# EAGLE board topboard (EAGLE 5.11)
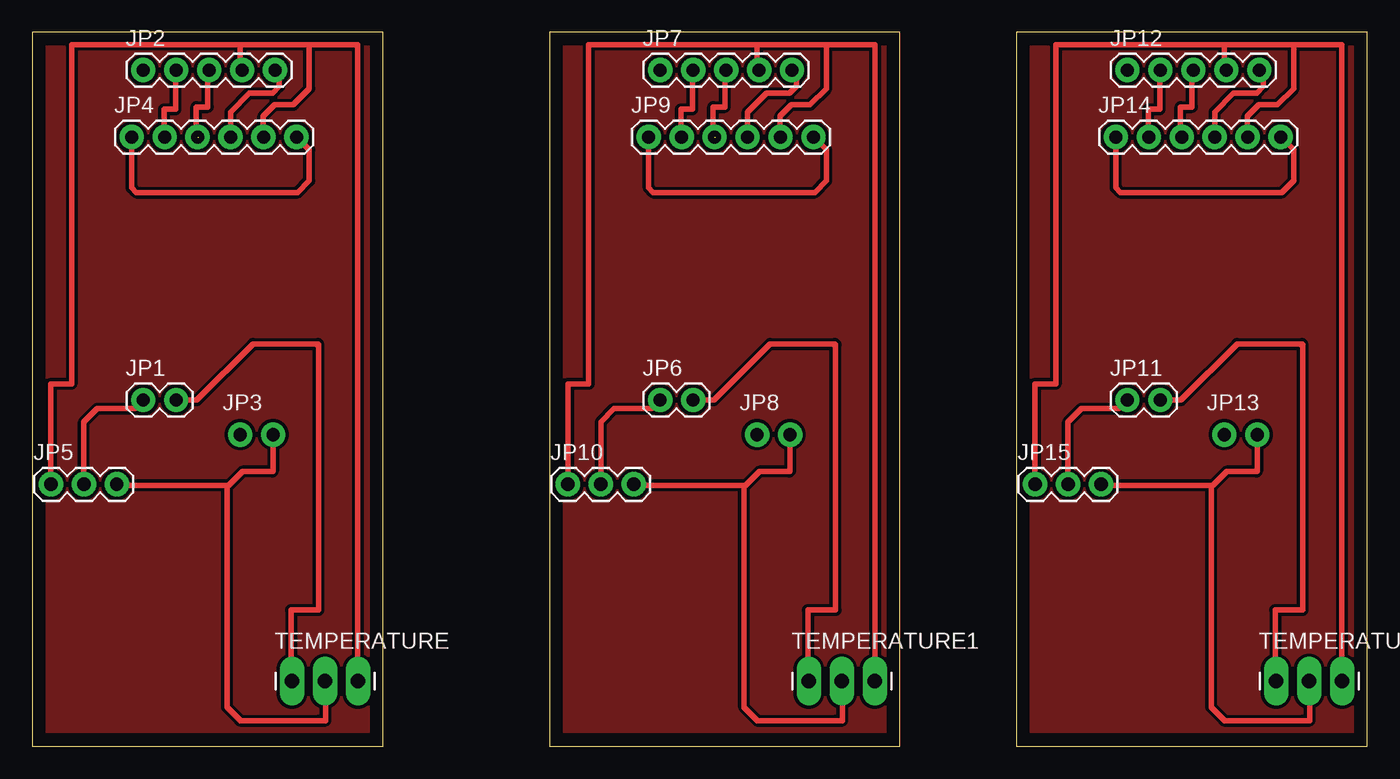
[diagram p0: board, top side]
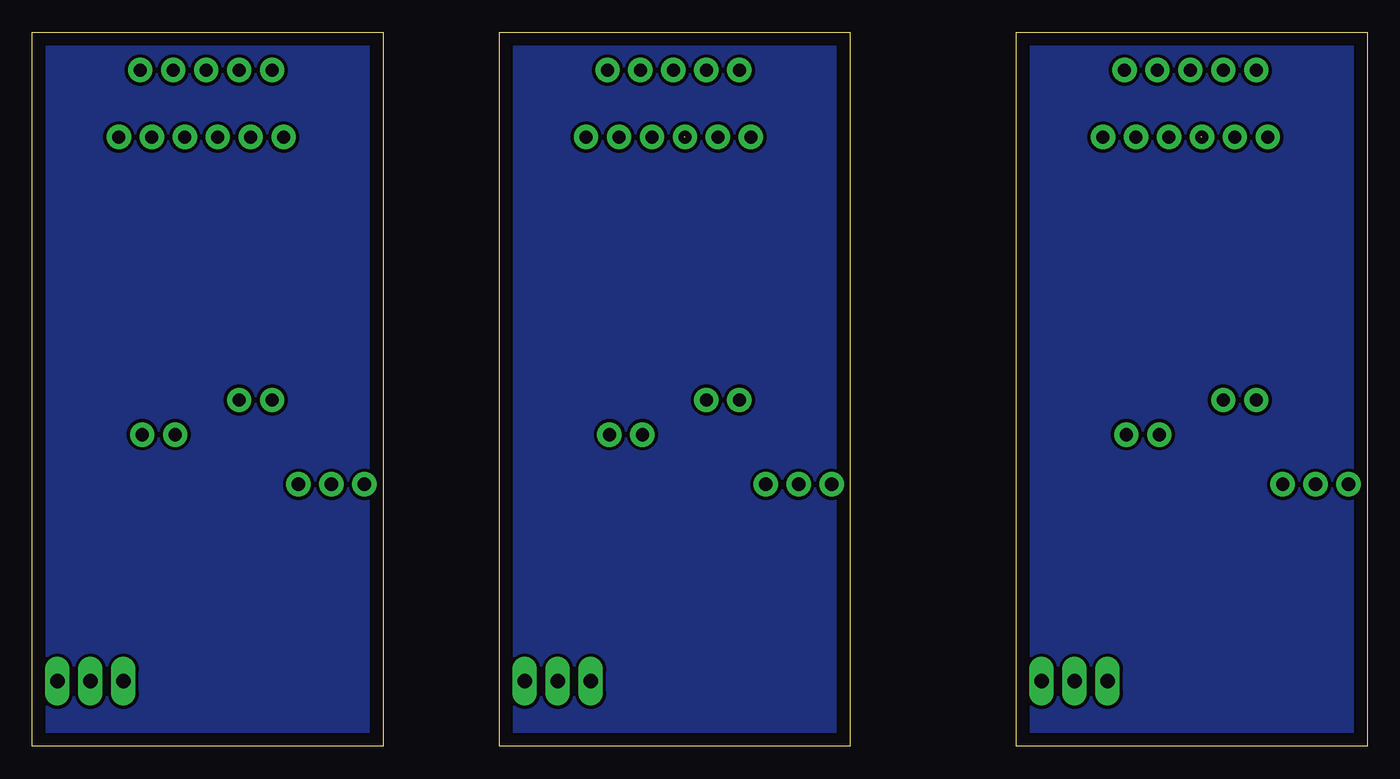
[diagram p1: board, bottom side, seen from below]

Size 102.83 x 55 mm. Coordinates in mm from the lower left corner, seen from the top.
Outline: 0,0 27,0 27,55 0,55 0,0
Outline: 39.83,0 66.83,0 66.83,55 39.83,55 39.83,0
Outline: 75.83,0 102.83,0 102.83,55 75.83,55 75.83,0
Copper layers (1*16): Top 0.035mm / dielectric 1.5mm / Bottom 0.035mm
Design rules "default": minimum track width 10mil, minimum drill 24mil, track to track 8mil, track to pad 8mil, pad to pad 8mil, via to via 8mil, smd to smd 8mil, copper to edge 40mil, drill to drill 8mil, minimum pad ring 10mil, minimum via ring 8mil, stop-mask expansion 4mil, vias tented up to drill 0mil, thermal gap 10mil

## Footprints (pad centres in the part's own frame; a part is rotated, then mirrored left to right if it is on the bottom)
1X02 = drill 1.016 pad 1.88 round: 1 0,0; 2 2.54,0
1X05 = drill 1.016 pad 1.88 round: 1 0,0; 2 2.54,0; 3 5.08,0; 4 7.62,0; 5 10.16,0
1X02_NO_SILK = drill 1.016 pad 1.88 round: 1 0,0; 2 2.54,0
1X06 = drill 1.016 pad 1.88 round: 1 0,0; 2 2.54,0; 3 5.08,0; 4 7.62,0; 5 10.16,0; 6 12.7,0
1X03 = drill 1.016 pad 1.88 round: 1 0,0; 2 2.54,0; 3 5.08,0
1X03_LONGPADS = drill 1.118 pad 1.88 long: 1 0,0; 2 2.54,0; 3 5.08,0

## Placement (x,y rotation side)
JP1  [1X02]  8.53,26.67 0 top
JP2  [1X05]  8.53,52.1 0 top
JP3  [1X02_NO_SILK]  16,24 0 top
JP4  [1X06]  7.65,46.94 0 top
JP5  [1X03]  1.42,20.18 0 top
JP6  [1X02]  48.36,26.67 0 top
JP7  [1X05]  48.36,52.1 0 top
JP8  [1X02_NO_SILK]  55.83,24 0 top
JP9  [1X06]  47.47,46.94 0 top
JP10  [1X03]  41.25,20.18 0 top
JP11  [1X02]  84.36,26.67 0 top
JP12  [1X05]  84.36,52.1 0 top
JP13  [1X02_NO_SILK]  91.83,24 0 top
JP14  [1X06]  83.47,46.94 0 top
JP15  [1X03]  77.25,20.18 0 top
TEMPERATURE  [1X03_LONGPADS]  20,5 0 top
TEMPERATURE1  [1X03_LONGPADS]  59.83,5 0 top
TEMPERATURE2  [1X03_LONGPADS]  95.83,5 0 top

## Library data of the parts
JP1-JP15 TEMPERATURE TEMPERATURE1 TEMPERATURE2 = SparkFun

## Nets
N$2: JP1.1 JP5.2
N$3: JP1.2
N$4: JP3.2 JP5.3
N$5: JP4.1 JP4.6
N$6: JP4.5
N$7: JP4.4
N$8: JP9.1 JP9.6
N$10: JP14.1 JP14.6
N$11: JP6.1 JP10.2
N$14: JP8.2 JP10.3
N$15: JP6.2
N$16: JP9.5
N$17: JP9.4
N$18: JP11.1 JP15.2
N$21: JP13.2 JP15.3
N$22: JP11.2
N$23: JP14.5
N$24: JP14.4
S$2: JP4.2
S$6: JP2.2
S$7: JP4.3
S$8: JP2.3
S$9: JP2.5
S$14: JP9.2
S$15: JP7.2
S$16: JP9.3
S$17: JP7.3
S$18: JP7.5
S$23: JP14.2
S$24: JP12.2
S$25: JP14.3
S$26: JP12.3
S$27: JP12.5

## Tracks (layer width: path | path; a pad name or v marks a point on that pad's centre or on a via)
N$1
  pour Top (isolate 0.254): 0,55.12 27.03,55.12 27.03,0 0,0
N$2
  Top 0.406: JP5.2 3.96,24.96 5,26 7.86,26 JP1.1
N$3
  Top 0.406: 22,31 17,31 12.67,26.67 JP1.2
N$4
  Top 0.406: JP3.2 18.54,21.21 18.49,21.16 16.18,21.16 15.11,20.09 6.59,20.09 JP5.3
N$5
  Top 0.406: JP4.1 7.64,43.03 8,42.67 20.45,42.67 21.34,43.56 21.34,45.95 JP4.6
  Bottom 0.254: 20.27,46.94 JP4.6
N$6
  Top 0.254: JP4.5 17.78,46.94
  Top 0.406: 16.18,52.09 16,52.27 16,54.05 | 21.34,54.05 16,54.05 | 21.34,54.05 25.07,54.05 25.07,4.98 | 21.34,54.05 21.34,50.67 20.09,49.43 18.67,49.43 17.78,48.54 17.78,46.94 | 16,54.05 3.02,54.05 3.02,27.91 1.42,27.91 1.42,20.09
N$7
  Top 0.406: 18.67,52.09 19.02,51.74 19.02,50.85 18.49,50.32 16.71,50.32 15.27,48.87 JP4.4
N$8
  Top 0.406: JP9.1 47.47,43.03 47.83,42.67 60.27,42.67 61.16,43.56 61.16,45.95 JP9.6
  Bottom 0.254: JP9.6 60.1,46.94
N$9
  pour Bottom (isolate 0.254): 0,54.94 27.03,54.94 27.03,-0.18 0,-0.18 0,55.12
N$10
  Top 0.406: JP14.1 83.47,43.03 83.83,42.67 96.27,42.67 97.16,43.56 97.16,45.95 JP14.6
  Bottom 0.254: JP14.6 96.1,46.94
N$11
  Top 0.406: JP10.2 43.79,24.96 44.83,26 47.69,26 JP6.1
N$12
  pour Top (isolate 0.254): 39.83,55.12 66.85,55.12 66.85,0 39.83,0
N$13
  pour Bottom (isolate 0.254): 39.83,54.94 66.85,54.94 66.85,-0.18 39.83,-0.18 39.83,55.12
N$14
  Top 0.406: JP8.2 58.37,21.21 58.32,21.16 56.01,21.16 54.94,20.09 46.42,20.09 JP10.3
N$15
  Top 0.406: 61.83,31 56.83,31 52.5,26.67 JP6.2
N$16
  Top 0.254: JP9.5 57.61,46.94
  Top 0.406: 56.01,52.09 55.83,52.27 55.83,54.05 | 61.16,54.05 55.83,54.05 | 61.16,54.05 64.9,54.05 64.9,4.98 | 61.16,54.05 61.16,50.67 59.92,49.43 58.5,49.43 57.61,48.54 57.61,46.94 | 55.83,54.05 42.85,54.05 42.85,27.91 41.25,27.91 41.25,20.09
N$17
  Top 0.406: 58.5,52.09 58.85,51.74 58.85,50.85 58.32,50.32 56.54,50.32 55.09,48.87 JP9.4
N$18
  Top 0.406: JP15.2 79.79,24.96 80.83,26 83.69,26 JP11.1
N$19
  pour Top (isolate 0.254): 75.83,55.12 102.85,55.12 102.85,0 75.83,0
N$20
  pour Bottom (isolate 0.254): 75.83,54.94 102.85,54.94 102.85,-0.18 75.83,-0.18 75.83,55.12
N$21
  Top 0.406: JP13.2 94.37,21.21 94.32,21.16 92.01,21.16 90.94,20.09 82.42,20.09 JP15.3
N$22
  Top 0.406: 97.83,31 92.83,31 88.5,26.67 JP11.2
N$23
  Top 0.254: JP14.5 93.61,46.94
  Top 0.406: 92.01,52.09 91.83,52.27 91.83,54.05 | 97.16,54.05 91.83,54.05 | 97.16,54.05 100.9,54.05 100.9,4.98 | 97.16,54.05 97.16,50.67 95.92,49.43 94.5,49.43 93.61,48.54 93.61,46.94 | 91.83,54.05 78.85,54.05 78.85,27.91 77.25,27.91 77.25,20.09
N$24
  Top 0.406: 94.5,52.09 94.85,51.74 94.85,50.85 94.32,50.32 92.54,50.32 91.09,48.87 JP14.4
N$25  (1 unrouted)
N$33  (1 unrouted)
N$41  (1 unrouted)
S$1
  Top 0.406: 15,20 15,3 16,2
S$2
  Top 0.254: 10.13,46.94 JP4.2
S$3
  Top 0.406: 19.91,10.49 19.91,4.8
S$4
  Top 0.406: 21.87,30.94 22.05,30.94 22.05,10.49 20.09,10.49
S$5
  Top 0.406: 22.58,4.98 22.58,1.96 22.05,1.96 16,1.96
S$6
  Top 0.406: JP2.2 11.02,52.09 11.02,49.07 10.13,49.07 10.13,46.94
S$7  (1 unrouted)
S$8
  Top 0.406: JP2.3 13.51,52.09 13.51,49.25 12.62,49.25 12.62,46.94
S$9
  Bottom 0.254: JP2.5 18.85,52.09
S$10
  Top 0.406: 61.7,30.94 61.87,30.94 61.87,10.49 59.92,10.49
S$11
  Top 0.406: 59.74,10.49 59.74,4.8
S$12
  Top 0.406: 54.83,20 54.83,3 55.83,2
S$13
  Top 0.406: 62.41,4.98 62.41,1.96 61.87,1.96 55.83,1.96
S$14
  Top 0.254: 49.96,46.94 JP9.2
S$15
  Top 0.406: JP7.2 50.85,52.09 50.85,49.07 49.96,49.07 49.96,46.94
S$16  (1 unrouted)
S$17
  Top 0.406: JP7.3 53.34,52.09 53.34,49.25 52.45,49.25 52.45,46.94
S$18
  Bottom 0.254: JP7.5 58.67,52.09
S$19
  Top 0.406: 97.7,30.94 97.87,30.94 97.87,10.49 95.92,10.49
S$20
  Top 0.406: 95.74,10.49 95.74,4.8
S$21
  Top 0.406: 90.83,20 90.83,3 91.83,2
S$22
  Top 0.406: 98.41,4.98 98.41,1.96 97.87,1.96 91.83,1.96
S$23
  Top 0.254: 85.96,46.94 JP14.2
S$24
  Top 0.406: JP12.2 86.85,52.09 86.85,49.07 85.96,49.07 85.96,46.94
S$26
  Top 0.406: JP12.3 89.34,52.09 89.34,49.25 88.45,49.25 88.45,46.94
S$27
  Bottom 0.254: JP12.5 94.67,52.09
S$35  (1 unrouted)
S$43  (1 unrouted)
S$51  (1 unrouted)